# Altium PCB Layout_GraderGPS.PcbDoc
Units mil, origin at the board's own origin, x right, y up, seen from the top; angles counter-clockwise.
Board outline 3268.39 x 2592.36 mil, 2 copper layers (Top Layer, Bottom Layer); 68 components, 48 nets, 308 pads, 141 vias.
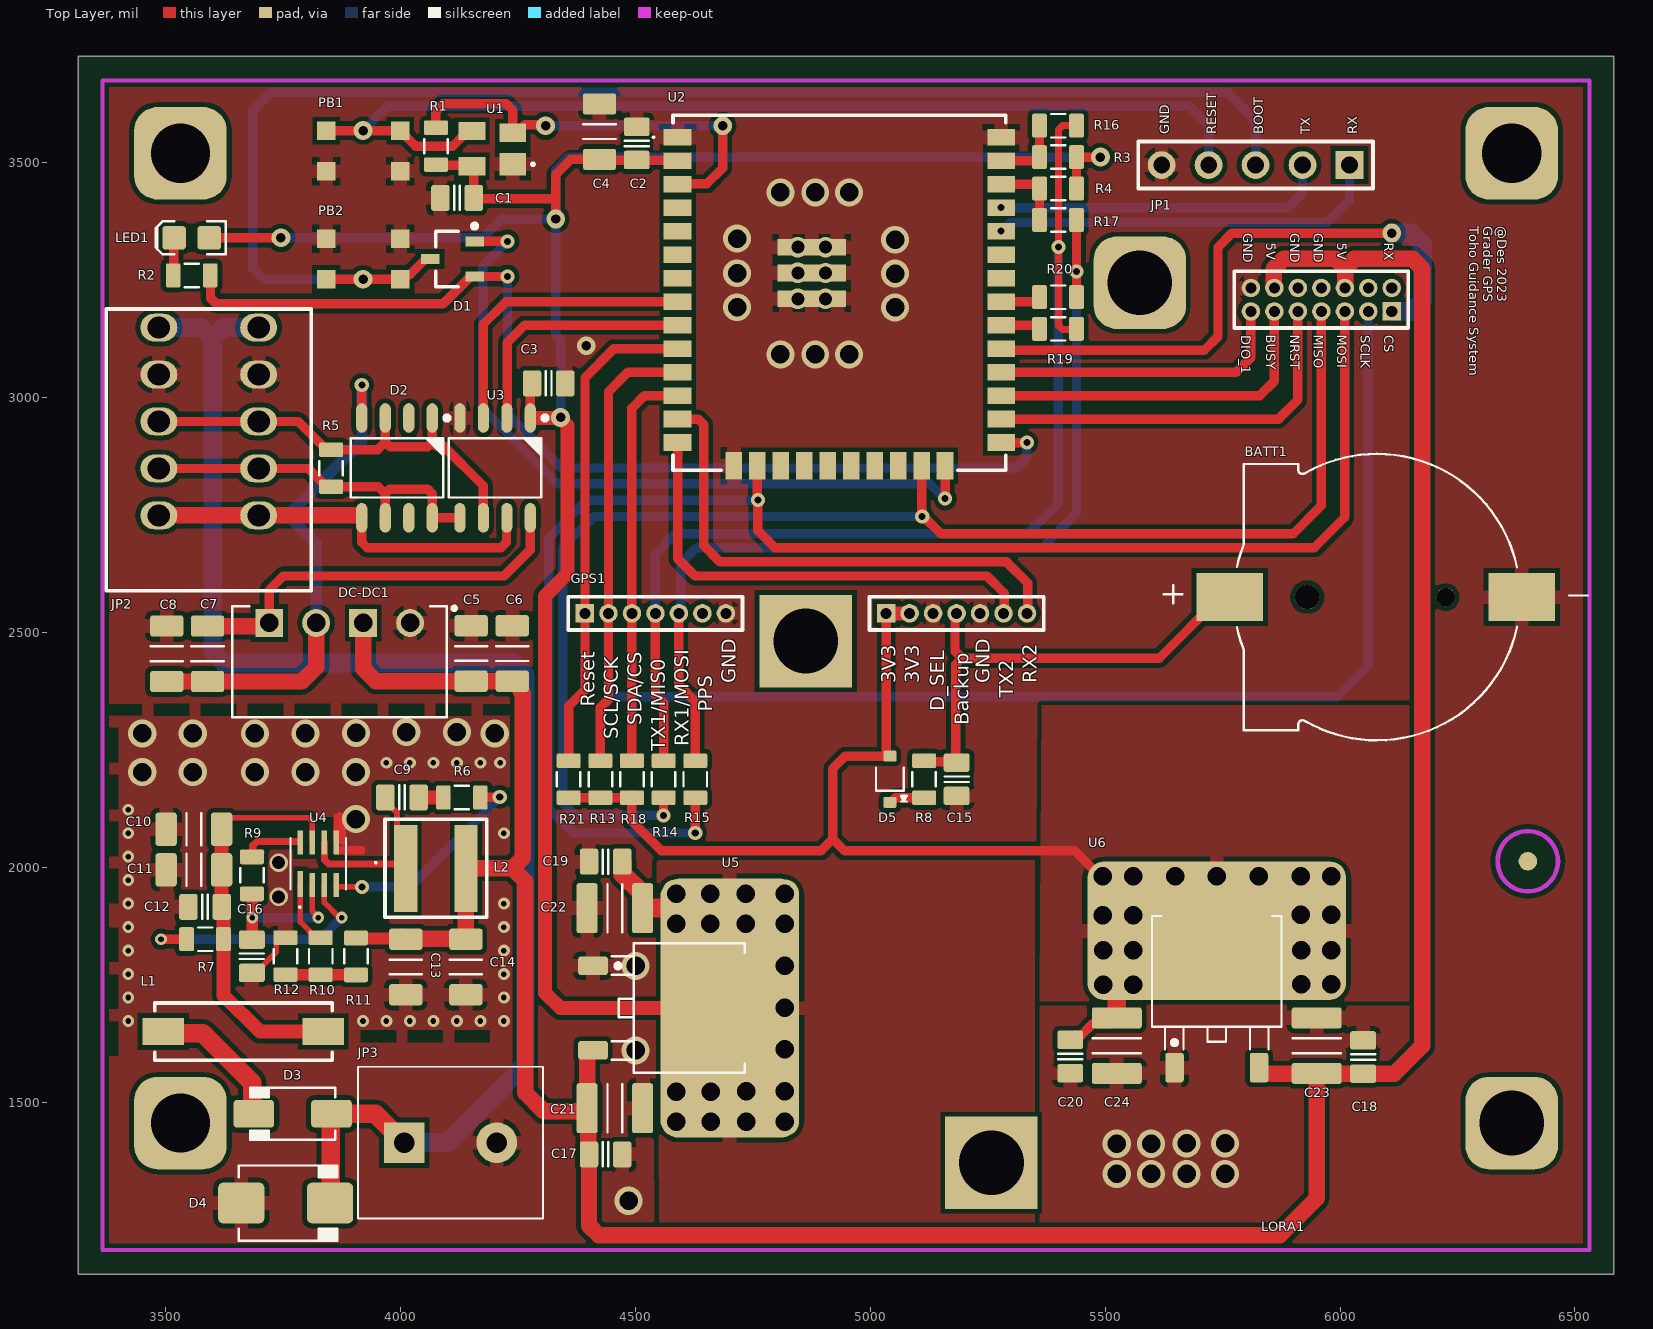
[diagram p0: Top Layer view]
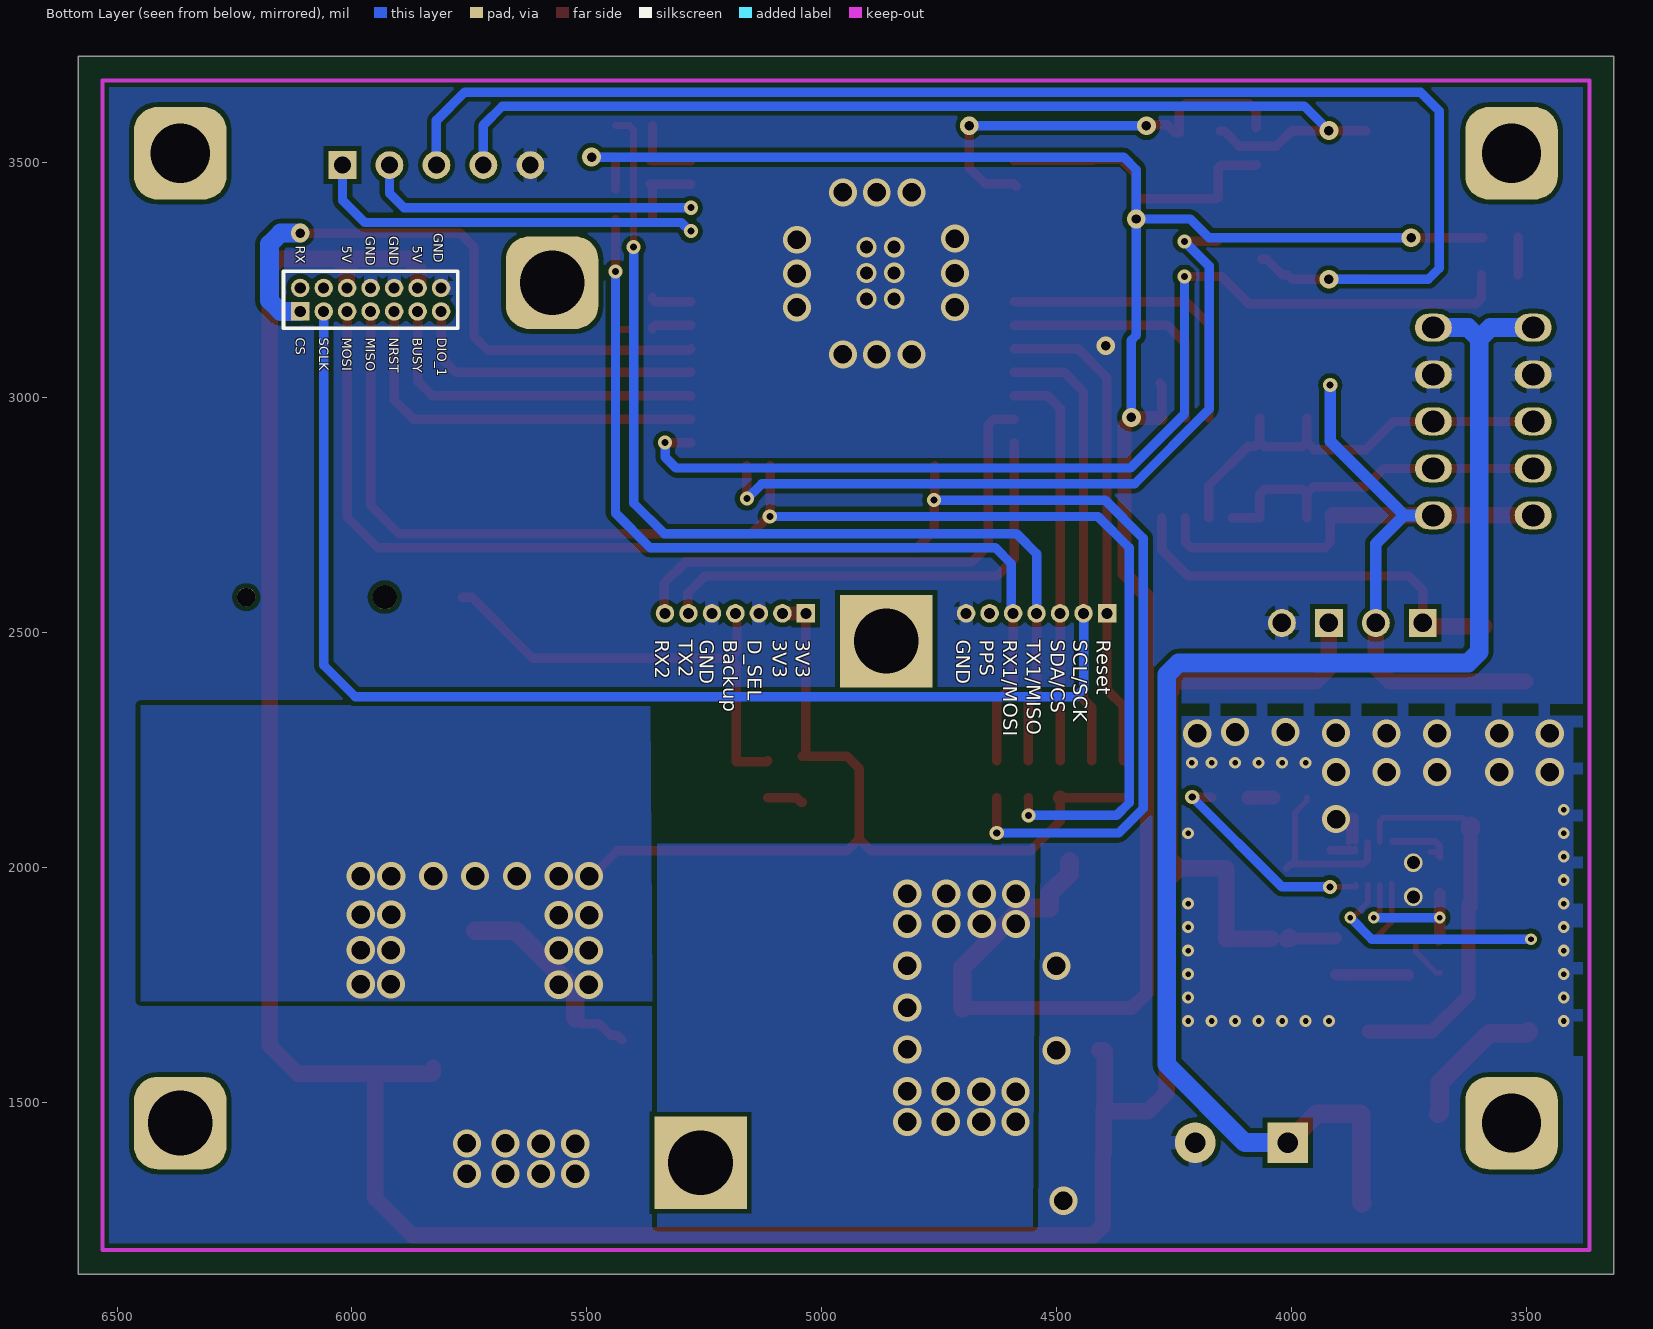
[diagram p1: Bottom Layer view, seen from below]

## Layer stack, top to bottom
Top Solder: solder mask 0.4, Solder Resist, Dk 3.5
Top Layer: signal copper 1.4
Dielectric 1: dielectric 12.6, FR-4, Dk 4.8
Bottom Layer: signal copper 1.4
Bottom Solder: solder mask 0.4, Solder Resist, Dk 3.5

## Board outline
3313.82,1133.82 3313.82,3726.18 6582.21,3726.18 6582.21,1133.82

## Design rules (kind name [scope] priority, off if disabled: settings)
Clearance [All] p1: gap=5 ignorepadtopadclearanceinfootprint=FALSE except(0: Arc-Hole Track-Hole SMDPad-Hole THPad-Hole Via-Hole Fill-Hole Poly-Hole Region-Hole Text-Hole)
HoleSize [All] p1: absolutevalues=TRUE maxlimit=1000 minlimit=1 maxpercent=80.000 minpercent=20.000
MinimumSolderMaskSliver [All] p1: minsoldermaskwidth=2
PolygonConnect [All] p1: thpad.connectstyle=Relief thpad.reliefconductorwidth=30 thpad.reliefentries=4 thpad.polygonreliefangle="90 Angle" thpad.airgapwidth=10 smdpad.connectstyle=Relief smdpad.reliefconductorwidth=30 smdpad.reliefentries=4 smdpad.polygonreliefangle="90 Angle" smdpad.airgapwidth=10 via.connectstyle=Direct via.reliefconductorwidth=10 via.reliefentries=4 via.polygonreliefangle="90 Angle" via.airgapwidth=10
RoutingVias [All] p1: holewidth=28 width=50 viastyle="Through Hole" minholewidth=28 minwidth=50 maxholewidth=28 maxwidth=50
SilkToSilkClearance [All] p1: silktosilkclearance=5
SilkToSolderMaskClearance [IsPad] p1: minsilkscreentomaskgap=2 clearancetoexposedcopper=TRUE
SolderMaskExpansion [All] p1: expansion=4 istentingtop=FALSE
Width [All] p1: maxlimit=100 minlimit=10 preferedwidth=30 minimp=50.000000 maximp=50.000000 favimp=50.000000
26 further rules are at their usual default settings.

## Components (designator, comment, footprint, x,y, rotation, side; value= is the part's Value field where it differs from the comment)
BATT1 "BAT" CR1220 6078.41,2574.99 r0 top
C1 "100nF" CAPC2012X135N 4120,3425 r180 top
C2 "100nF" CAPC2012X135N 4502.4,3541.12 r270 top
C3 "100nF" CAPC2012X135N 4315,3030 r0 top
C4 "10uF" CAPC3216X100N 4423.3,3565.96 r270 top
C5 "10uF" CAPC3216X180N 4150,2455 r270 top value=10uF/25v
C6 "10uF" CAPC3216X180N 4237.34,2454.92 r270 top value=10uF/25v
C7 "2.2uF/25V" CAPC3216X100N 3588.8,2454.39 r270 top value=10uF/25v
C8 "270pF/2kV" CAPC3216X175N 3501.92,2454.39 r270 top
C9 "100nF" CAPC2012X135N 4002.75,2148.62 r0 top
C10 "10uF" CAPC3216X180N 3559.64,2080.73 r0 top
C11 "10uF" CAPC3216X180N 3559.64,1994.46 r0 top
C12 "1uF" CAPC2012X135N 3583.5,1915.55 r0 top
C13 "22uF" CAPC3216X180N 4010.67,1787.56 r90 top
C14 "22uF" CAPC3216X180N 4138.62,1787.56 r90 top
C15 "100nF" CAPC2012X135N 5183.46,2187.28 r90 top
C16 "100nF" CAPC2012X135N 3683.11,1810.47 r90 top
C17 "100nF" CAPC2012X135N 4436.3,1388.52 r180 top
C18 "100nF" CAPC2012X135N 6048.89,1595.71 r270 top
C19 "100nF" CAPC2012X135N 4436.3,2011.94 r0 top
C20 "100nF" CAPC2012X135N 5425.38,1596.96 r90 top
C21 "47uF/16V" CAPC3225X220N 4455.83,1487.03 r0 top
C22 "47uF/16V" CAPC3225X220N 4455.83,1912.86 r180 top
C23 "47uF/16V" CAPC3225X220N 5950.03,1619.99 r90 top
C24 "47uF/16V" CAPC3225X220N 5524.54,1619.99 r270 top
D1 "BAT54C" SC59-3 4110,3295 r180 top
D2 "ESDA25B1RL" SOIC127P600X175-8AN 3992.12,2850.08 r270 top
D3 "1N4007" DO-214AC 3770,1475 r180 top
D4 "SMBJ28A" DO-214AA 3755,1285 r0 top
D5 "CUS520,H3F" SOD323 5041.56,2187.28 r90 top
DC-DC1 "PDSE1-S5-S5-S" "PDSE1-S (1W)" 3870,2565.28 r180 top
GPS1 "RTK-GPS" ZED-F9P 5382.28,1250.2 r90 top locked
JP1 "Debug" HDR1X5 6020,3495 r180 top
JP2 "Header 5" "Term_Block - 5P" 3591.27,2888.31 r270 top
JP3 "Input Power" 2828362 4007.59,1413.62 r180 top
L1 "470uH/1.5A/24V" INDP9630X28N 3665,1650 r0 top
L2 "10uH" IND_5.4X5.3 4074.64,1997.56 r0 top
LED1 "Blue" LED-0805-A 3555,3340 r180 top
LORA1 "E22-400M30S" 22s-V3 5970,2305 r90 top locked
PB1 "Master RST" PushButton1688 3920,3525 r180 top
PB2 "Boot" PushButton1688 3920,3295 r0 top
R1 "10K" RESC2012X70N 4075,3535 r90 top value=560
R2 "1k" RESC2012X70N 3555,3260 r0 top value=560
R3 "3k3" RESC2012X70N 5399.45,3511.73 r180 top
R4 "3k3" RESC2012X70N 5399.45,3444.77 r180 top
R5 "120" RESC2012X70N 3851.86,2849.33 r270 top value=560
R6 "20" RESC2012X70N 4130.11,2148.45 r0 top
R7 "1M" RESC2012X70N 3583.5,1846.69 r0 top
R8 "1K" RESC2012X70N 5114.37,2187.28 r270 top value=560
R9 "100K" RESC2012X70N 3683.11,1982.61 r90 top
R10 "51K" RESC2012X70N 3829.64,1810.47 r90 top
R11 "41K2" RESC2012X70N 3904.64,1810.16 r270 top
R12 "7K68" RESC2012X70N 3754.64,1810.47 r90 top
R13 "3K3" RESC2012X70N 4425.01,2187.28 r90 top
R14 "0R" RESC2012X70N 4559.66,2187.28 r270 top
R15 "0R" RESC2012X70N 4627.11,2187.28 r270 top
R16 "0R" RESC2012X70N 5399.45,3578.71 r180 top
R17 "0R" RESC2012X70N 5399.45,3378.12 r180 top
R18 "3K3" RESC2012X70N 4492.28,2187.28 r270 top
R19 "0R" RESC2012X70N 5399.46,3146.22 r180 top
R20 "0R" RESC2012X70N 5399.46,3213.5 r180 top
R21 "3K3" RESC2012X70N 4357.49,2187.28 r270 top
U1 "MIC6315-29D3UY-TR" MIC631529D3UYTR 4195,3530 r90 top
U2 "ESP32-WROOM-32UE-N16" ESP32WROOM32UEN16 4933.94,3222.99 r0 top locked
U3 "ISO1044BD" SOIC127P600X175-8AN 4200.87,2850.08 r270 top
U4 "MP9943GQ-Z" MP9943GQZ-SMD 3824.64,2007.56 r90 top
U5 "LD1117-3.3" TO-252 4555,1700 r270 top
U6 "LD1117-3.3" TO-252 5737.4,1719.05 r0 top

## Footprints (in the part's own frame and the unit in brackets; to place one, negate y for a bottom-side part, rotate by r counter-clockwise, add the part's x,y. Pads: shape width x height; smd on the part's side, far side on the other; paste and mask are expansions set on the pad)
22s-V3 [mm] "Lora 22s"
  rect 1x1 hole 0.6: 1(22.306,-3.556)
  round 1 hole 0.6: 2(23.576,-3.556) 3(22.306,-2.286) 4(23.576,-2.286) 5(22.306,-1.016) 6(23.576,-1.016) 7(22.306,0.254) 8(23.576,0.254) 9(22.306,1.524) 10(23.576,1.524) 11(22.306,2.794) 12(23.576,2.794) 13(22.306,4.064) 14(23.576,4.064)
  rrect50% 5x5 hole 3.5: S/2(-21.583,-10.043) S/2(23.86,10.069)
  body extent -35.73,-14.25 28.05,14.26, height 9.7
2828362 [mm]
  rect 2.2x2.2 hole 1.1: 1(0,0)
  round 2.2 hole 1.1: 2(-5,0)
  silkscreen extent -7.5,-4.1 2.5,4.1, body extent -8.09,-4.1 2.51,4.1, height 10.02
CAPC2012X135N [mm] "Chip Capacitor, Body 2.0x1.2mm, EIA 0805, IPC Medium Density"
  round 0.254 on Mech15: 0(0,0)
  rrect25% 1x1.4 smd: 1(-0.9,0) 2(0.9,0)
  Top Layer pour cut-out: -0.675,0.7 -0.475,0.9 0.475,0.9 0.675,0.7 0.675,-0.7 0.475,-0.9 -0.475,-0.9 -0.675,-0.7
  silkscreen extent -0.15,-0.65 0.15,0.65, body extent -1.1,-0.72 1.1,0.73, height 1.34
CAPC3216X100N [mm] "Chip Capacitor, Body 3.2x1.6mm, 1.0mm H, EIA 1206, IPC Medium Density"
  round 0.508 on Mech15: 0(0,0)
  rrect25% 1.15x1.8 smd: 1(-1.5,0) 2(1.5,0)
  silkscreen extent -0.4,-0.88 0.4,0.88, body extent -1.7,-0.9 1.7,0.9, height 1
CAPC3216X175N [mm] "Chip Capacitor, Body 3.2x1.6mm, 1.75mm H, EIA 1206, IPC Medium Density"
  round 0.508 on Mech15: 0(0,0)
  rrect25% 1.15x1.8 smd: 1(-1.5,0) 2(1.5,0)
  silkscreen extent -0.4,-0.88 0.4,0.88, body extent -1.7,-0.9 1.7,0.9, height 1.75
CAPC3216X180N [mm] "Chip Capacitor, Body 3.2x1.6mm, 1.8mm H, EIA 1206, IPC Medium Density"
  round 0.508 on Mech15: 0(0,0)
  rrect25% 1.15x1.8 smd: 1(-1.5,0) 2(1.5,0)
  silkscreen extent -0.4,-0.88 0.4,0.88, body extent -1.7,-0.9 1.7,0.9, height 1.8
CAPC3225X220N [mm] "Chip Capacitor, Body 3.2x2.5mm, EIA 1210, IPC Medium Density"
  round 0.508 on Mech15: 0(0,0)
  rrect25% 1.15x2.7 smd: 1(-1.5,0) 2(1.5,0)
  silkscreen extent -0.4,-1.3 0.4,1.3, body extent -1.8,-1.4 1.8,1.4, height 2.19
CR1220 [mm] "Holder battery size CR1220"
  rect 3.6x2.6 smd: 1(-7.97,0) 2(7.82,0)
  round 1.3 hole 1.3 unplated: ""(-3.77,0)
  round 1 hole 1 unplated: ""(3.72,0)
  silkscreen extent -11.52,-7.74 11.4,7.75, body extent -9.41,-7.56 9.39,7.58, height 4.13
DO-214AA [mm] "JEDEC DO214 variation AA. SMB"
  round 0.508 on Mech15: 0(0,0)
  rrect25% 2.5x2.2 smd: 1(-2.4,0) 2(2.4,0)
  silkscreen extent -2.54,-2.03 2.79,2.03, body extent -2.8,-1.97 2.8,1.98, height 2.62
DO-214AC [mm] "JEDEC DO214 variation AC. SMA"
  round 0.508 on Mech15: 0(0,0)
  rrect25% 2.2x1.5 smd: 1(-2.1,0) 2(2.1,0)
  silkscreen extent -2.3,-1.4 2.3,1.4, body extent -2.6,-1.3 2.6,1.3, height 2.42
ESP32WROOM32UEN16 [mm]
  rect 1.5x0.9 smd: 1(-8.75,8.41) 2(-8.75,7.14) 3(-8.75,5.87) 4(-8.75,4.6) 5(-8.75,3.33) 6(-8.75,2.06) 7(-8.75,0.79) 8(-8.75,-0.48) 9(-8.75,-1.75) 10(-8.75,-3.02) 11(-8.75,-4.29) 12(-8.75,-5.56) 13(-8.75,-6.83) 14(-8.75,-8.1) 25(8.75,-8.1) 26(8.75,-6.83) 27(8.75,-5.56) 28(8.75,-4.29) 29(8.75,-3.02) 30(8.75,-1.75) 31(8.75,-0.48) 32(8.75,0.79) 33(8.75,2.06) 34(8.75,3.33) 35(8.75,4.6) 36(8.75,5.87) 37(8.75,7.14) 38(8.75,8.41)
  rect 0.9x1.5 smd: 15(-5.715,-9.35) 16(-4.445,-9.35) 17(-3.175,-9.35) 18(-1.905,-9.35) 19(-0.635,-9.35) 20(0.635,-9.35) 21(1.905,-9.35) 22(3.175,-9.35) 23(4.445,-9.35) 24(5.715,-9.35)
  rect 0.9x0.9 smd: 39(-1.5,1.07) 40(-2.9,1.07) 41(-0.1,1.07) 42(-2.9,-0.33) 43(-1.5,-0.33) 44(-0.1,-0.33) 45(-0.1,2.47) 46(-1.5,2.47) 47(-2.9,2.47)
  silkscreen extent -10.1,-9.6 9,9.6, body extent -9.03,-9.67 9.04,9.57, height 3.4
HDR1X5 [mm] "Connector; Header; 5 Position"
  rect 1.5x1.5 hole 0.9: 1(0,0)
  round 1.5 hole 0.9: 2(2.54,0) 3(5.08,0) 4(7.62,0) 5(10.16,0)
  silkscreen extent -1.27,-1.27 11.43,1.27
IND_5.4X5.3 [mm]
  rect 1.25x4.7 smd: 1(-1.625,0) 2(1.625,0)
  silkscreen extent -3.3,-2.65 2.75,2.65, body extent -2.75,-2.65 2.75,2.65, height 5.1
INDP9630X28N [mm] "Precision Wire Wound Inductor, 2-Leads, Body 9,60x3,05mm, IPC Medium Density"
  rect 2.25x1.45 smd: 1(-4.325,0) 2(4.325,0)
  silkscreen extent -4.8,-1.55 4.8,1.55, body extent -4.8,-1.53 4.8,1.53, height 2.84
LED-0805-A [mil]
  round 20 on Mech15: 0(0,0)
  rrect25% 50x50 smd: 1(37.5,0) 2(-37.5,0)
  Top Layer pour cut-out: -15,30 15,30 15,-30 -15,-30
  silkscreen extent -72,-35 77,35, body extent -39,-25 39,25, height 31
MIC631529D3UYTR [mm]
  rect 1.2x1.44 smd: 1(-0.85,-1.1)
  rect 1x1.44 smd: 2(0.85,-1.1) 3(0.95,1.1) 4(-0.95,1.1)
  silkscreen extent -0.9,-2.25 -0.8,-2.15, body extent -1.46,-0.65 1.46,0.65, height 1.22
MP9943GQZ-SMD [mm]
  rect 1.4x0.3 smd: 1(-1.1,0.975)
  rect 1.3x0.3 smd: 2(-1.15,0.325) 3(-1.15,-0.325) 4(-1.15,-0.975) 5(1.15,-0.975) 6(1.15,-0.325) 7(1.15,0.325) 8(1.15,0.975)
  silkscreen extent -2.4,-1.5 1.4,1.5, body extent -1.5,-1.5 1.5,1.5, height 1.1
"PDSE1-S (1W)" [mm] "DC-DC"
  round 1.508 hole 1: 1(-3.81,1.15) 3(1.27,1.15)
  rect 1.508x1.508 hole 1: 2(-1.27,1.15) 4(3.81,1.15)
  silkscreen extent -6.3,0.25 5.8,6.25, body extent -5.8,0.25 5.8,6.25, height 10
PushButton1688 [mm]
  rect 1x1 smd: 1(-2,1.1) 2(2,1.1) 3(-2,-1.1) 4(2,-1.1)
RESC2012X70N [mm] "Chip Resistor, Body 2.0x1.2mm, EIA 0805, IPC Medium Density"
  round 0.254 on Mech15: 0(0,0)
  rrect25% 0.8x1.3 smd: 1(-1,0) 2(1,0)
  Top Layer pour cut-out: -0.725,0.65 -0.525,0.85 0.525,0.85 0.725,0.65 0.725,-0.65 0.525,-0.85 -0.525,-0.85 -0.725,-0.65
  silkscreen extent -0.38,-0.64 0.38,0.64, body extent -1.1,-0.67 1.1,0.68, height 0.69
SC59-3 [mm]
  rect 1x0.55 smd: 1(-1.2,-0.95) 2(-1.2,0.95) 3(1.2,0)
  silkscreen extent -1.33,-1.9 0.9,1.5, body extent -1.3,-1.45 1.3,1.45, height 1.14
SOD323 [mm] "SOD-323; 2 Leads; Body 1.8 x 1.35 mm, (LxW)"
  round 0.508 on Mech15: 0(0,0)
  rrect25% 0.6x0.7 smd: 1(1.25,0) 2(-1.25,0)
  silkscreen extent -1.2,-0.9 0.64,0.75, body extent -1.3,-0.68 1.3,0.68, height 1.1
SOIC127P600X175-8AN [mm] "SOIC, 8-Leads, Body 4.9x3.9mm, Pitch 1.27mm, IPC Medium Density"
  round 1 on Mech15: 0(0,0)
  oval 1.6x0.6 smd: 1(-2.7,1.905) 2(-2.7,0.635) 3(-2.7,-0.635) 4(-2.7,-1.905) 5(2.7,-1.905) 6(2.7,-0.635) 7(2.7,0.635) 8(2.7,1.905)
  silkscreen extent -2.82,-2.5 1.6,2.83, body extent -3,-2.45 3,2.45, height 1.75
"Term_Block - 5P" [mm]
  oval 1.5x2 hole 1.2: 1(-6.62,-2.7) 1(-6.62,2.7) 2(-4.08,2.7) 2(-4.08,-2.7) 3(-1.54,2.7) 3(-1.54,-2.7) 4(1,2.7) 4(1,-2.7) 5(3.54,2.7) 5(3.54,-2.7)
  silkscreen extent -7.62,-5.55 7.62,5.55
TO-252 [mm] "D-PAK/TO-252-AA; 3 Leads (1 Cropped); Body 10.3 (inc. leads) x 6.7 mm (LxW max)"
  round 0.5 on Mech15: 0(0,0)
  rrect25% 1x1.6 smd: 1(-2.285,-3.7) 3(2.285,-3.7)
  rrect25% 14x7.5 smd: 4(0,3.7)
  silkscreen extent -3.5,-2.7 3.5,4.5, body extent -3.3,-3.95 3.3,5.76, height 2.31
ZED-F9P [mm] "GPS Sensor"
  rect 1x1 hole 0.6: 1(32.774,25.146) 8(32.774,8.86)
  round 1 hole 0.6: 2(32.774,23.876) 3(32.774,22.606) 4(32.774,21.336) 5(32.774,20.066) 6(32.774,18.796) 7(32.774,17.526) 9(32.774,7.59) 10(32.774,6.32) 11(32.774,5.05) 12(32.774,3.78) 13(32.774,2.51) 14(32.774,1.24)
  rect 5x5 hole 3.5: S/2(3.067,3.167) S/2(31.274,13.208)
  silkscreen extent 31.87,0.34 33.67,26.05, body extent 0,0 34.13,26.42, height 10

## Part data
BATT1: library part MHDR1X2, "Header, 2-Pin", LatestRevisionDate=17-Jul-2002, LatestRevisionNote="Re-released for DXP Platform.", Publisher="Altium Limited"
C1 C2 C3 C4 C5 C6 C7 C8 C9 C10 C11 C12 C13 C14 C15 C16 C17 C18 C19 C20: library part Cap, "Capacitor", LatestRevisionDate=17-Jul-2002, LatestRevisionNote="Re-released for DXP Platform.", PackageDescription="Radial Cap, Thru-Hole; 2 Leads; 0.3 in Pin Spacing", PackageReference=RAD-0.3, Published=8-Jun-2000, Publisher="Altium Limited"
C21 C22 C23 C24: library part KCM55WC71E107MH13L, "Capacitor", Manufacturer_Name="Murata Electronics", Mouser Part Number=81-KCM55WC71E107MH13, Datasheet Link=https://psearch.en.murata.com/capacitor/product/KCM55WC71E107MH13%23.html, Height=6.7mm, Manufacturer_Part_Number=KCM55WC71E107MH13L, Mouser Price/Stock=https://www.mouser.co.uk/ProductDetail/Murata-Electronics/KCM55WC71E107MH13L/?qs=rrS6PyfT74chf2MiAK9y9w%3D%3D, type=Ceramic
D1: library part RB420
D2: "TVS DIODA", Manufacturer_Name=STMicroelectronics, Mouser Part Number=511-ESDA25B1-TR, Arrow Part Number=ESDA25B1RL, Arrow Price/Stock=https://www.arrow.com/en/products/esda25b1rl/stmicroelectronics?region=nac, Datasheet Link=https://datasheet.datasheetarchive.com/originals/distributors/Datasheets-31/DSA-604715.pdf, Height=1.75mm, Manufacturer_Part_Number=ESDA25B1RL, Mouser Price/Stock=https://www.mouser.co.uk/ProductDetail/STMicroelectronics/ESDA25B1RL?qs=W9XpDeWYzcpfBY1EWDH0LA%3D%3D
D3: library part "Diode 1N4001", "1 Amp General Purpose Rectifier", Code_JEDEC=DO-204-AL, ComponentLink1Description="Manufacturer Link", ComponentLink1URL=http://www.fairchildsemi.com/, ComponentLink2Description=Datasheet, ComponentLink2URL=http://www.fairchildsemi.com/ds/1N%2F1N4001.pdf, DatasheetVersion=1998, LatestRevisionDate=17-Jul-2002, LatestRevisionNote="Re-released for DXP Platform.", PackageDescription="Diode, Axial; Body 5.2 x 2.7 mm (LxDia. max), Lead Dia. 0.86 mm (max)", PackageReference=DO-41, PackageVersion=Aug-1999, Published=8-Jun-2000, Publisher="Altium Limited"
D4: library part "D Schottky", "Schottky Diode", Code_JEDEC=DO-214-AA, LatestRevisionDate=17-Jul-2002, LatestRevisionNote="Re-released for DXP Platform.", PackageDescription="DO-214-AA/SMB; 2 C-Bend Leads; Body 5.3 x 3.6 mm, inc. leads (LxW)", PackageReference=SMB, Published=8-Jun-2000, Publisher="Altium Limited"
D5: library part "D Zener", "Zener Diode", LatestRevisionDate=17-Jul-2002, LatestRevisionNote="Re-released for DXP Platform.", PackageDescription="Diode, Thru-Hole; 2 Leads; 0.7 in Pin Spacing", PackageReference=DIODE-0.7, Published=8-Jun-2000, Publisher="Altium Limited"
DC-DC1: library part PDSE1-S24-S12-S, "DC-DC 24 to 12  / PDSE1-S24-S12-S"
GPS1: library part ZED-F9P, "GPS Sensor"
JP1: library part "Header 5", "Header, 5-Pin", LatestRevisionDate=17-Jul-2002, LatestRevisionNote="Re-released for DXP Platform.", Publisher="Altium Limited"
JP2: "Header, 5-Pin", LatestRevisionDate=17-Jul-2002, LatestRevisionNote="Re-released for DXP Platform.", Publisher="Altium Limited"
JP3: library part "Header 2", "Header, 2-Pin", LatestRevisionDate=17-Jul-2002, LatestRevisionNote="Re-released for DXP Platform.", Publisher="Altium Limited"
L1 L2: library part MPL-AL5050-100, "Inductor", Manufacturer_Name="Monolithic Power Systems (MPS)", Mouser Part Number=946-MPL-AL5050-100, Datasheet Link=https://www.monolithicpower.com/en/documentview/productdocument/index/version/2/document_type/Datasheet/lang/en/sku/MPL-AL5050-100/document_id/5809/, Height=5mm, Manufacturer_Part_Number=MPL-AL5050-100, Mouser Price/Stock=https://www.mouser.co.uk/ProductDetail/Monolithic-Power-Systems-MPS/MPL-AL5050-100?qs=sPbYRqrBIVm5wy9Bi%2FiK%252BQ%3D%3D
LED1: library part LED1, "Typical Blue GaAs LED", LatestRevisionDate=08-Jul-2005, LatestRevisionNote="Mech Layer 1 removed.", PackageDescription="LED; 2 Leads", PackageReference=LED-1, Published=8-Jun-2000, Publisher="Altium Limited"
LORA1: library part Lora, "Lora 22S / Lora 30S"
PB1 PB2: library part PB_SW_1
R1 R2 R3 R4 R5 R6 R7 R8 R9 R10 R11 R12 R13 R14 R15 R16 R17 R18 R19 R20 R21: library part Res2, "Resistor", LatestRevisionDate=17-Jul-2002, LatestRevisionNote="Re-released for DXP Platform.", PackageDescription="Axial Device, Thru-Hole; 2 Leads; 0.4 in Pin Spacing", PackageReference=AXIAL-0.4, Published=8-Jun-2000, Publisher="Altium Limited"
U1: "Integrated Circuit", Manufacturer_Name=Microchip, Mouser Part Number=998-MIC6315-29D3UYTR, Datasheet Link=http://ww1.microchip.com/downloads/en/devicedoc/mic6315.pdf, Height=1.12mm, Manufacturer_Part_Number=MIC6315-29D3UY-TR, Mouser Price/Stock=https://www.mouser.co.uk/ProductDetail/Microchip-Technology-Micrel/MIC6315-29D3UY-TR?qs=Y3Q3JoKAO1RCG5WxNvIuAQ%3D%3D
U2: library part ESP32-WROOM-32UE-N16A
U3: "Integrated Circuit", Manufacturer_Name="Texas Instruments", Mouser Part Number=595-ISO1044BD, Arrow Part Number=ISO1044BD, Arrow Price/Stock=https://www.arrow.com/en/products/iso1044bd/texas-instruments?region=nac, Datasheet Link=https://www.ti.com/lit/ds/symlink/iso1044.pdf?ts=1621674257443&ref_url=https%253A%252F%252Fwww.ti.com%252Fstore%252Fti%252Fen%252Fp%252Fproduct%252F%253Fp%253DISO1044BD, Height=1.75mm, Manufacturer_Part_Number=ISO1044BD, Mouser Price/Stock=https://www.mouser.co.uk/ProductDetail/Texas-Instruments/ISO1044BD?qs=W%2FMpXkg%252BdQ6CUu0TGf8UTA%3D%3D
U4: "Integrated Circuit", Manufacturer_Name="Monolithic Power Systems (MPS)", Mouser Part Number=946-MP9943GQ-Z, Datasheet Link=https://www.monolithicpower.com/jp/documentview/productdocument/index/version/2/document_type/Datasheet/lang/en/sku/MP9943/document_id/865/, Height=1mm, Manufacturer_Part_Number=MP9943GQ-Z, Mouser Price/Stock=https://www.mouser.co.uk/ProductDetail/Monolithic-Power-Systems-MPS/MP9943GQ-Z?qs=493kPxzlxfKVcyEndxwGRg%3D%3D
U5 U6: library part LM1117-3.3V, "AP2114D-3.3TRG1, 3.3V LDO Voltage Regulator"

## Free pads (board coordinates)
  round 39.37 smd paste-39.37 mask+39.37: 2(6399.65,2012.56)
  rrect50% 196.85x196.85 hole 125.98: S/2(3531.02,1455.28) S/2(3531.02,3520) S/2(6365.39,3520)

## Via types
v1: diameter 60, hole 39.37, Top Layer to Bottom Layer, 63 vias
v2: diameter 25, hole 11.81, Top Layer to Bottom Layer, 33 vias
v3: diameter 30, hole 15, Top Layer to Bottom Layer, 15 vias
v4: diameter 59.06, hole 39.37, Top Layer to Bottom Layer, 12 vias
v5: diameter 40, hole 20, Top Layer to Bottom Layer, 10 vias
v6: diameter 43.31, hole 27.56, Top Layer to Bottom Layer, 6 vias
v7: diameter 39.37, hole 27.56, Top Layer to Bottom Layer, 2 vias

## Nets (pads, with @x,y where several pads share a name; then routed paths per layer and width w, separated by ;. In a path a pad name is that pad's centre, name@x,y a point inside that pad or via, vN(x,y) a via of type N, cw(c..) or ccw(c..) an arc to the next point about the centre after c; other vN are vias at no path point)
3V3: C1.1 C2.2 C3.1 C4.2 C19.2 C22.1 LED1.2 R1.1 R3.1 R4.1 U1.4 U2.2 U3.1 U5.4 | length 5498.4
  Top Layer w20: LED1.2 v5(3745,3340) ; R1.1 4076.52,3494.11 4150.18,3494.11 U1.4 4155.63,3488.66 C1.1@4155.63,3428.94 ; C1.1 4159.57,3425 4161.32,3423.25 4330,3423.25 ; U3.1 4275.87,3026.3 C3.1 ; v5(4330,3380) 4330,3423.25 ; 4330.48,3423.25 4330,3423.25 ; C4.2@4423.3,3505.5 4588.04,3505.5 U2.2 ; C4.2 4361.91,3506.91 4330,3475 4330,3423.25 ; R4.1 R3.1 v5@5489.69,3511.73
  Top Layer w30: U3.1@4279.05,2956.12 4338.92,2956.12 v5(4340.46,2957.65) 4340.46,2954.95 4355,2940.4 4355,2625 4306.9,2576.9 4306.9,2001.77 4307.5,2001.17 4307.5,1732.5 4340,1700 U5.4
  Top Layer w40: C19.2 4472.05,2011.62 4472.05,1986.21 4514.89,1943.37 C22.1 4574.32,1912.86 4700.67,1786.51 U5.4
  Bottom Layer w20: v5(3745,3340) 4175,3340 4215,3380 v5(4330,3380) ; v5(4340.46,2957.65) 4340.46,3122.02 4330,3132.48 v5(4330,3380) ; v5(5489.69,3511.76) 4356.76,3511.76 4330,3485 v5(4330,3380)
  other v1: 4587.05,1457.77 4659.96,1457.77 4735.48,1457.77 4817.56,1457.77 4587.05,1521.98 4659.96,1521.98 4735.48,1522.85 4817.56,1522.85 4817.56,1611.95 4817.56,1701.05 4817.56,1790.16 4586.19,1879.26 4659.1,1879.26 4734.61,1879.26 4817.56,1879.26 4586.19,1943.14 4659.1,1943.14 4734.61,1943.98 4817.56,1943.98
3V3_GPS: C20.2 C24.1 D5.1 GPS1.8 GPS1.9 R13.1 R18.2 R21.2 U6.4 | length 2337.5
  Top Layer w20: R21.2@4357.96,2147.91 R13.1 R18.2 ; R18.2@4491.72,2147.16 4491.72,2098.28 4555,2035 4895,2035 4920,2060 ; GPS1.8 5033.46,2242.63 D5.1@5039.6,2236.5 ; D5.1 5033.46,2236.5 4946.5,2236.5 4920,2210 4920,2060 ; C20.2 5435.07,1642.08 5448.71,1642.08 5473.03,1666.41 5511.91,1666.41 C24.1 ; U6.4@5492.25,1977.75 5435,2035 4945,2035 4920,2060
  Top Layer w30: R18.2@4491.72,2147.16 4492.28,2147.72 R18.2 ; GPS1.8 GPS1.9
  Top Layer w40: C24.1 5524.54,1738.37 5650.89,1864.72 U6.4
  other v1: 5495.73,1749.79 5559.61,1749.79 5916.89,1750.66 5981.1,1750.66 5495.73,1822.7 5559.61,1822.7 5916.89,1823.57 5981.1,1823.57 5494.89,1898.21 5559.61,1898.21 5916.02,1899.08 5981.1,1899.08 5494.89,1981.17 5559.61,1981.17 5648.71,1981.17 5737.82,1981.17 5826.92,1981.17 5916.02,1981.17 5981.1,1981.17
5V_IN: C5.2 C6.2 C13.2 C14.2 C17.2 C18.2 C21.1 C23.1 DC-DC1.2 L2.2 LORA1.6 LORA1.12 R11.1 U5.3 U6.3 | length 6657.8
  Top Layer w25: R11.1 3906.1,1848.07 4001.1,1848.07 4007.97,1848.07 C13.2@4009.47,1846.58
  Top Layer w35: DC-DC1.2 3920,2422.99 3947.04,2395.94 4130,2395.94 C5.2 ; C13.2@4001.1,1848.07 C13.2@4004.78,1851.76 ; C13.2@4009.47,1846.58 C13.2@4009.51,1846.62 ; C13.2@4042.66,1847.58 4137.66,1847.58 C14.2 L2.2 4237.5,1997.56 ; C5.2@4151.85,2395.91 C6.2 C6.2 ; C6.2@4240.45,2395.87 4250.14,2395.87 4255.28,2390.73 4255.28,2374.6 4259.65,2370.23 4259.65,2019.71 4237.5,1997.56 ; U5.3 4398.96,1610.04 4396.77,1607.85 C21.1 ; U6.3 5827.36,1562.46 5829.55,1560.27 C23.1@5950.03,1560.27 ; LORA1.12 5859.16,3234.01 5859.16,3274.5 5879.67,3295 5991.17,3295 6010.84,3275.33 ; C23.1 C23.1@5950.03,1560.27 ; LORA1.6 6010.84,3234.01 6010.84,3275.33 ; 4237.5,1997.56 4265,1970.06 4265,1520 4305,1480 4391.64,1480 4391.64,1481.89 C21.1 ; C21.1 4398.82,1484.98 4398.82,1390.56 C17.2 4400.87,1236.94 4421.37,1216.44 5871.44,1216.44 5950.03,1295.03 C23.1@5950.03,1560.27 ; C23.1@5950.03,1560.27 C18.2 6115.27,1560.27 6175,1620 6175,3274.5 6154.5,3295 6030.5,3295 6010.84,3275.33
5V_IS: C7.1 DC-DC1.4 U3.8 | length 854
  Top Layer w20: DC-DC1.4 3720,2590 3750,2620 4220,2620 4275.42,2675.42 4275.42,2743.33 U3.8
  Top Layer w35: C7.1 DC-DC1.4@3713.45,2513.45
Batt: BATT1.1 C15.2 GPS1.11 R8.1 | length 1020.5
  Top Layer w20: R8.1 5116.34,2224.69 5181.5,2224.69 5181.5,2431.5 5195,2445 ; GPS1.11 5180,2537.06 5180,2460 5195,2445 ; BATT1.1 5744.96,2575 5614.96,2445 5195,2445
BOOT: D1.3 JP1.3 PB2.3 PB2.4 | length 3090.5
  Top Layer w20: PB2.3 v5(3920,3251.69) PB2.4 4008.43,3261.38 4019.31,3261.38 4052.1,3294.17 4061.93,3294.17 D1.3
  Bottom Layer w20: v5(3920,3251.69) 3708.31,3251.69 3685,3275 3685,3610 3725,3650 5760,3650 5820,3590 JP1.3
BOOT1: D1.1 U2.24 | length 1582.1
  Top Layer w20: D1.1 v3(4227.37,3332.4) ; v3(5158.94,2784.76) U2.24
  Bottom Layer w20: v3(4227.37,3332.4) 4175,3280.03 4175,2975 4333.4,2816.6 5127.09,2816.6 v3(5158.94,2784.76)
BOOT2: D1.2 R2.2 U2.25 | length 2251.9
  Top Layer w20: R2.2@3595,3261.34 3595,3211.72 3606.72,3200 4090.79,3200 4148.39,3257.59 D1.2 v3(4227.37,3257.59) ; U2.25 5278.51,2904.01 v3(5333.15,2904.01)
  Bottom Layer w20: v3(4227.37,3257.59) 4227.37,2965.06 4342.43,2850 5310,2850 5333.15,2873.15 v3(5333.15,2904.01)
Busy: LORA1.11 U2.27 | length 742.5
  Top Layer w20: U2.27 5829.09,3004.09 5860,3035 LORA1.11
CANH: D2.1 D2.3 JP2.3 R5.1 U3.6 | length 940.4
  Top Layer w20: JP2.3@3484.97,2948.94 3697.57,2948.94 3781.78,2948.94 3842.02,2888.7 R5.1 3950.74,2888.7 3967.12,2905.08 ; D2.3 3967.12,2905.08 ; D2.1 4067.12,2905.08 ; U3.6 4175.87,2812.2 4092.2,2895.87 4076.34,2895.87 4067.12,2905.08 ; 3967.12,2905.08 3977.12,2895.08 4057.12,2895.08 4067.12,2905.08
CANL: D2.6 D2.8 JP2.4 R5.2 U3.5 | length 774.1
  Top Layer w20: JP2.4@3484.97,2848.94 3697.57,2848.94 3803.04,2848.94 3842.02,2809.96 R5.2 3952.25,2809.96 3967.12,2795.08 ; D2.6 3967.12,2795.08 ; U3.5 D2.8 4067.12,2795.08 4057.12,2805.08 3977.12,2805.08 3967.12,2795.08
CS_GPS: GPS1.3 R18.1 U2.12 | length 858.9
  Top Layer w20: R18.1 GPS1.3 4492.28,2977.28 4519.09,3004.09 U2.12
CS_LoRa: LORA1.1 U2.29 | length 1317.7
  Top Layer w20: U2.29 5281.89,3100.63 5710.63,3100.63 5740,3130 5740,3320 5770,3350 v5(6110,3350)
  Bottom Layer w40: LORA1.1 6151.91,3183.17 6175.34,3206.6 6175.34,3326.57 6151.91,3350 v5(6110,3350)
GND: BATT1.2 C1.2 C2.1 C3.2 C4.1 C5.1 C6.1 C8.1 C10.1 C11.1 C12.1 C13.1 C14.1 C15.1 C16.1 C17.1 C18.1 C19.1 C20.1 C21.2 C22.2 C23.2 C24.2 D4.1 DC-DC1.1 GPS1.7 GPS1.10 GPS1.12 JP1.5 JP2.2 JP3.2 LORA1.8 LORA1.10 LORA1.14 PB1.1 PB1.2 PB2.1 PB2.2 R12.2 U1.1 U2.1 U2.15 U2.38 U2.39 U2.40 U2.41 U2.42 U2.43 U2.44 U2.45 U2.46 U2.47 U3.4 U4.5 U5.1 U6.1 | length 389.8
  Top Layer w12: C16.1 3690.98,1775.04 3735.05,1819.11 3735.05,1840.09 3744.8,1849.84 R12.2 ; U4.5@3862.91,2033.1 3917.91,2033.1 ; U4.5 3863.03,2107.84 ; U4.5@3863.51,2039.13 3918.51,2039.13 ; 3869.54,2056.3 3869.54,2111.3 ; 3877.27,2052.12 v1@3877.27,2107.12
  other v1: 4485,1290 5524.61,1346.85 5597.52,1346.85 5673.04,1346.85 5755.12,1346.85 5524.61,1411.06 5597.52,1411.06 5673.04,1411.93 5755.12,1411.93 4500,1610 4500,1790 3904.64,2102.56 3449.76,2202.56 3557.23,2202.56 3689.7,2202.56 3797.17,2202.56 3904.64,2202.56 3449.76,2284.91 3557.23,2284.91 3689.65,2284.91 3797.12,2284.91 4200,2285 3904.91,2285.88 4012.06,2287.56 4119.53,2287.56
  other v2: 3419.64,1672.56 3919.64,1672.56 3969.64,1672.56 4019.64,1672.56 4069.64,1672.56 4119.65,1672.56 4169.65,1672.56 4219.65,1672.56 3419.64,1722.56 4219.65,1722.56 3419.64,1772.56 4219.65,1772.56 3419.64,1822.56 4219.65,1822.56 3419.64,1872.56 4219.65,1872.56 3419.64,1922.56 4219.65,1922.56 3419.64,1972.56 3419.64,2022.56 3419.64,2072.56 4219.65,2072.56 3419.64,2122.56 3969.64,2222.56 4019.64,2222.56 4069.64,2222.56 4119.65,2222.56 4169.65,2222.56 4211.51,2222.56
  other v4: 4808.44,3091.7 4882.38,3091.7 4954.55,3091.7 4716.08,3192.28 5052.38,3191.7 4716.08,3264.45 5052.38,3263.87 5052.38,3336.04 4716.08,3338.38 4808.44,3436.7 4882.38,3436.7 4954.55,3436.7
  other v5: 4395,3110
  other v6: 4845.41,3209.98 4904.36,3210.02 4845.41,3265.3 4904.36,3264.94 4845.41,3320.22 4904.36,3320.25
  other v7: 3740,1936.91 3740,2010
GND_CAN: C7.2 C8.2 D2.4 D2.5 DC-DC1.3 JP2.5 U3.7 | length 2002.6
  Top Layer w20: D2.5 3917.12,2691.72 3928.84,2680 4213.28,2680 4225.17,2691.89 4225.17,2743.09 U3.7 ; D2.4 v3(3917.12,3026.5)
  Top Layer w35: JP2.5@3484.97,2748.94 3697.57,2748.94 3697.95,2749.32 D2.5@3911.59,2749.32 ; C8.2 C7.2 3789.5,2395.34 3820,2425.84 DC-DC1.3
  Bottom Layer w25: JP2.5@3697.57,2748.94 3759.48,2748.94 ; DC-DC1.3 3820,2688.42 3759.48,2748.94 ; v3(3917.12,3026.5) 3917.12,2906.58 3759.48,2748.94
GPS_MISO: GPS1.4 R14.1 R16.1 R19.1 | length 2451.7
  Top Layer w12: v3(5400,3320.18) 5400,3375
  Top Layer w15: R16.1 5408.79,3578.71 5400,3569.92 v3(5400,3320.18) 5400,3153.79 5408.79,3145 5437.61,3145 R19.1
  Top Layer w20: GPS1.4 4542.28,2367.72 4559.66,2350.34 R14.1
  Bottom Layer w20: GPS1.4 4542.28,2667.28 4585.17,2710.17 5335.17,2710.17 5400,2775 v3(5400,3320.18)
GPS_MOSI: GPS1.5 R15.1 R17.1 R20.1 | length 2001.9
  Top Layer w20: GPS1.5 4592.28,2387.72 4627.11,2352.89 R15.1@4627.11,2226.65 ; v3(5438.83,3268.32) R17.1 ; R20.1 v3(5438.83,3268.32)
  Bottom Layer w20: GPS1.5 4595.99,2544.23 4595.99,2645.99 4630,2680 5365,2680 5438.83,2753.83 v3(5438.83,3268.32)
IOLoRa: LORA1.13 U2.28 | length 642.5
  Top Layer w20: U2.28 5779.09,3054.09 5810,3085 LORA1.13
MISO: LORA1.7 R14.2 U2.23 | length 3007
  Top Layer w20: R14.2 4559.56,2147.8 4559.56,2110.39 v3(4559.7,2110.25) ; v3@5108.94,2750 U2.23 ; v3(5110.27,2746.73) 5113.27,2746.73 5150,2710 5900,2710 5960,2770 LORA1.7
  Bottom Layer w20: v3(4559.7,2110.25) 4372.18,2110.25 4345,2137.43 4345,2680 4411.6,2746.6 5110.14,2746.6 v3(5110.27,2746.73)
MOSI: LORA1.5 R15.2 U2.16 | length 3322.9
  Top Layer w20: v3(4627.11,2072.83) R15.2 ; v3@4758.94,2790 U2.16 ; v3(4760.48,2781.6) 4760.48,2716.31 4796.8,2680 5945,2680 6010,2745 LORA1.5
  Bottom Layer w20: v3(4627.11,2072.83) 4367.17,2072.83 4315,2125 4315,2700 4396.6,2781.6 v3(4760.48,2781.6)
NetC9_1: C9.1 L2.1 U4.6 | length 369.2
  Top Layer w12: C9.1 3967.31,2140.75 3992.12,2115.94 3992.12,2016.11 L2.1@3998.23,2010
  Top Layer w15: U4.6 3837.44,2015.82 3846.23,2007.03 4001.2,2007.03 L2.1
NetC9_2: C9.2 R6.1 | length 53.7
  Top Layer w30: C9.2 4038.27,2148.54 4090.65,2148.54 R6.1 R6.1@4091.49,2147.7
NetC16_2: C16.2 R9.1 U4.2 | length 313.9
  Top Layer w12: U4.2 3811.85,1906.2 3824.64,1893.41 v2(3824.64,1892.67)
  Top Layer w25: R9.1@3683.82,1943.24 3684.04,1943.02 3684.04,1848.15 C16.2@3686.28,1845.9
  Bottom Layer w20: v2(3684.04,1892.67) v2(3824.64,1892.67)
NetD3_2: D3.2 L1.1 | length 301.8
  Top Layer w40: L1.1 3498.43,1646.29 3578.71,1646.29 3683.9,1541.1 3683.9,1478.42 D3.2
NetD5_2: D5.2 R8.2 | length 76.9
  Top Layer w20: D5.2 5043.53,2138.07 5053.38,2147.91 R8.2
NetLED1_1: LED1.1 R2.1 | length 80
  Top Layer w20: R2.1@3516.57,3260.94 LED1.1@3516.57,3340.93
NetR6_2: R6.2 U4.4 | length 473.6
  Top Layer w12: U4.4 3863.03,1958.23 3863.13,1958.14 v3(3917.94,1958.14)
  Top Layer w20: R6.2 4170.1,2149.07 4210.26,2149.07 v3(4210.88,2149.69)
  Bottom Layer w20: v3(3917.94,1958.14) 4019.95,1958.14 4210.88,2149.06 v3(4210.88,2149.69)
NetR7_1: R7.1 U4.3 | length 546.6
  Top Layer w12: U4.3 3837.44,1924.58 3866.87,1895.16 3872.24,1895.16 v2@3874.64,1897.56
  Top Layer w20: v2(3489.64,1846.69) R7.1
  Bottom Layer w20: v2(3489.64,1846.69) 3828.67,1846.69 v2(3874.64,1892.67)
NetR9_2: R9.2 U4.8 | length 138.7
  Top Layer w12: R9.2@3693.57,2031.72 R9.2@3703.92,2031.72
  Top Layer w15: R9.2 3685,2023.87 3685,2046.21 3693.79,2055 U4.8@3784.66,2055
NetR10_1: R10.1 R11.2 R12.1 | length 151.9
  Top Layer w25: R12.1@3751.28,1770.51 R12.1@3751.91,1771.14 ; R12.1 3754.8,1770.94 3904.49,1770.94 R11.2 ; R11.2@3885.42,1770.79 R11.2@3886.05,1770.16
NetR10_2: R10.2 U4.1 | length 139.4
  Top Layer w12: U4.1 3786.26,1883.38 3819.8,1849.84 R10.2 ; R10.2@3818.68,1850.11 R10.2@3819.57,1849.22
NRST: LORA1.9 U2.26 | length 836.7
  Top Layer w20: U2.26 5869.09,2954.09 5910,2995 LORA1.9
RESET: JP1.4 PB1.3 PB1.4 U1.3 | length 2252
  Top Layer w20: PB1.4 v5@3911.38,3568.31 ; v5(3920,3568.31) PB1.3 4032.05,3535 4110.63,3535 4133.35,3557.72 4143.03,3567.4 U1.3
  Bottom Layer w20: v5(3920,3568.31) 3920.4,3568.31 3972.09,3620 5680,3620 5720,3580 JP1.4
RST: R1.2 U1.2 U2.3 | length 922.9
  Top Layer w20: R1.2 4075,3610 4090,3625 4225,3625 4238.31,3611.69 U1.2 4246.97,3563.46 4264.18,3580.68 v5@4312.36,3580.68 ; U2.3@4585.35,3450 U2.3 4590.35,3455 4651.74,3455 4685.41,3488.67 v5(4685.41,3578.46)
  Bottom Layer w20: v5(4308.43,3578.46) v5(4685.41,3578.46)
RTK_RST_1: GPS1.1 R21.1 U2.10 | length 1052.8
  Top Layer w20: R21.1 4357.49,2342.49 4392.28,2377.28 GPS1.1 4392.28,3042.28 4454.09,3104.09 U2.10
RXD0: JP1.1 U2.34 | length 843.9
  Bottom Layer w20: v3(5278.43,3354.09) 5280.25,3354.09 5298.65,3372.49 5972.49,3372.49 6020,3420 JP1.1
RXD1: R19.2 U2.30 | length 86.2
  Top Layer w20: U2.30 5354.34,3154.09 5360.09,3148.35 R19.2
RXD2: GPS1.13 U2.14 | length 1016.5
  Top Layer w20: U2.14 4589.45,2657.2 4626.65,2620 5248.28,2620 5285,2583.28 5285,2542.06 GPS1.13
RXD3: U2.8 U3.3 | length 633
  Top Layer w20: U3.3 4175.87,3155.87 4224.09,3204.09 U2.8
SCL: R3.2 R16.2 U2.37 | length 152.6
  Top Layer w20: U2.37 R3.2@5364.09,3504.09 ; R3.2 R16.2
SCLK: GPS1.2 LORA1.3 R13.2 U2.11 | length 3524.5
  Top Layer w20: R13.2 4425.01,2340.01 4442.28,2357.28 GPS1.2 4442.28,3012.28 4484.09,3054.09 U2.11
  Bottom Layer w20: GPS1.2 4442.11,2540.35 4442.11,2378.65 4457.72,2363.04 5993.04,2363.04 6060,2430 LORA1.3
SDA: R4.2 R17.2 U2.36 | length 153.1
  Top Layer w20: U2.36 R4.2@5364.88,3454.09 ; R17.2 R4.2
TXD0: JP1.2 U2.35 | length 714.4
  Bottom Layer w20: v3(5278.43,3404.09) 5889.09,3404.09 5920,3435 JP1.2
TXD1: R20.2 U2.31 | length 87.7
  Top Layer w20: U2.31 5354.34,3204.09 5360.09,3209.84 R20.2
TXD2: GPS1.14 U2.13 | length 1106
  Top Layer w20: U2.13 4633.28,2954.09 4645,2942.38 4645,2685 4680,2650 5290,2650 5335,2605 5335,2542.06 GPS1.14
TXD3: U2.9 U3.2 | length 538.9
  Top Layer w20: U3.2 4226.56,2957.07 4226.56,3116.56 4264.09,3154.09 U2.9
VIN: D3.1 D4.2 JP2.1 JP3.1 | length 3112.1
  Top Layer w40: D4.2 3851.08,1286.59 3851.08,1473.41 D3.1 3946.2,1475 JP3.1
  Bottom Layer w40: JP2.1@3484.97,3148.94 3576.57,3148.94 3600,3125.51 ; JP2.1@3697.57,3148.94 3623.43,3148.94 3600,3125.51 ; JP3.1 4098.62,1413.62 4265,1580 4265,2410 4240,2435 3623.43,2435 3600,2458.43 3600,3125.51
VIN_0: C10.2 C11.2 C12.2 L1.2 R7.2 U4.7 | length 865.8
  Top Layer w12: C10.2@3618.69,2088.36 3635.33,2105 3804.82,2105 3811.85,2097.97 U4.7
  Top Layer w30: C10.2 3618.81,2080.61 3618.81,1994.46 C12.2@3618.81,1925.86 ; C12.2 3618.81,1915.67 C12.2@3618.81,1925.86 ; L1.2 3700,1650 3622.87,1727.13 R7.2 3622.87,1921.8 C12.2@3618.81,1925.86
  Top Layer w40: C10.2 C10.2@3618.69,2088.36
pads on no net: BATT1. C1.0 C2.0 C3.0 C4.0 C5.0 C6.0 C7.0 C8.0 C9.0 C10.0 C11.0 C12.0 C13.0 C14.0 C15.0 C16.0 C17.0 C18.0 C19.0 C20.0 C21.0 C22.0 C23.0 C24.0 D2.0 D2.2 D2.7 D3.0 D4.0 D5.0 GPS1.6 GPS1.S/2 LED1.0 LORA1.2 LORA1.4 LORA1.S/2 R1.0 R2.0 R3.0 R4.0 R5.0 R6.0 R7.0 R8.0 R9.0 R10.0 R11.0 R12.0 R13.0 R14.0 R15.0 R16.0 R17.0 R18.0 R19.0 R20.0 R21.0 U2.4 U2.5 U2.6 U2.7 U2.17 U2.18 U2.19 U2.20 U2.21 U2.22 U2.32 U2.33 U3.0 U5.0 U6.0

## Polygon pours and split planes (outlines as drawn)
GND on Bottom Layer "GNDt_Bot" (solid, remove dead copper, pour order 5): 6531.03,3675 6531.03,1185 3365,1185 3365,3675
3V3_GPS on Bottom Layer "3V3_GPS" (solid, remove dead copper, pour order 1): 5360,1715 6450,1715 6450,2345 5365.16,2345
3V3 on Bottom Layer "3V3" (solid, remove dead copper, pour order 0): 4544.66,2050 5350,2050 5350,1235 4550.28,1235
GND on Top Layer "GNDt_Top" (solid, remove dead copper, pour order 4): 6531.03,3675 6531.03,1185 3365,1185 3365,3675
3V3_GPS on Top Layer "3V3_GPS" (solid, remove dead copper, pour order 3): 5360,1715 6450,1715 6450,2345 5365.16,2345
3V3 on Top Layer "3V3" (solid, remove dead copper, pour order 2): 4544.66,2050 5350,2050 5350,1235 4550.28,1235

## Keep-outs
Top Layer:
  circle w10: c6399.65,2012.56 r64.17
Keep-Out Layer:
  lines w7.87: 3365,1185 6531.03,1185 6531.03,3675 3365,3675 3365,1185

## Other copper
Top Layer:
  pour cut-out: 3399.64,1597.56 3399.64,1672.56 3374.64,1672.56 3374.64,1597.56
  pour cut-out: 4190,1652.5 4115,1652.5 4115,1627.5 4190,1627.5
  pour cut-out: 4090,1652.5 4015,1652.5 4015,1627.5 4090,1627.5
  pour cut-out: 3990,1652.5 3915,1652.5 3915,1627.5 3990,1627.5
  pour cut-out: 4174.71,2322.51 4261.54,2322.51 4261.54,2347.51 4174.71,2347.51
  pour cut-out: 4262.5,1700 4262.5,1775 4237.5,1775 4237.5,1700
  pour cut-out: 4262.5,1800 4262.5,1875 4237.5,1875 4237.5,1800
  pour cut-out: 4262.5,1925 4262.5,2000 4237.5,2000 4237.5,1925
  pour cut-out: 4262.5,2025 4262.5,2100 4237.5,2100 4237.5,2025
  pour cut-out: 4262.5,2125 4262.5,2200 4237.5,2200 4237.5,2125
  pour cut-out: 4262.5,2225 4262.5,2300 4237.5,2300 4237.5,2225
  pour cut-out: 3782.48,2038.69
  pour cut-out: 3782.48,2038.69
  pour cut-out: 3399.64,2222.56 3399.64,2297.56 3374.64,2297.56 3374.64,2222.56
  pour cut-out: 3399.64,2122.56 3399.64,2197.56 3374.64,2197.56 3374.64,2122.56
  pour cut-out: 3399.64,2022.56 3399.64,2097.56 3374.64,2097.56 3374.64,2022.56
  pour cut-out: 3399.64,1922.56 3399.64,1997.56 3374.64,1997.56 3374.64,1922.56
  pour cut-out: 3399.64,1797.56 3399.64,1872.56 3374.64,1872.56 3374.64,1797.56
  pour cut-out: 3399.64,1697.56 3399.64,1772.56 3374.64,1772.56 3374.64,1697.56
  pour cut-out: 4074.71,2322.51 4149.71,2322.51 4149.71,2347.51 4074.71,2347.51
  pour cut-out: 3974.71,2322.51 4049.71,2322.51 4049.71,2347.51 3974.71,2347.51
  pour cut-out: 3874.71,2322.51 3949.71,2322.51 3949.71,2347.51 3874.71,2347.51
  pour cut-out: 3774.71,2322.51 3849.71,2322.51 3849.71,2347.51 3774.71,2347.51
  pour cut-out: 3674.71,2322.51 3749.71,2322.51 3749.71,2347.51 3674.71,2347.51
  pour cut-out: 3574.71,2322.51 3649.71,2322.51 3649.71,2347.51 3574.71,2347.51
  pour cut-out: 3474.71,2322.51 3549.71,2322.51 3549.71,2347.51 3474.71,2347.51
  pour cut-out: 3374.71,2322.51 3374.71,2347.51 3449.71,2347.51 3449.71,2322.51
  pour cut-out: 3449.64,2347.56 3374.64,2347.56 3374.64,2322.56 3449.64,2322.56
  pour cut-out: 3549.64,2347.56 3474.64,2347.56 3474.64,2322.56 3549.64,2322.56
  pour cut-out: 3649.64,2347.56 3574.64,2347.56 3574.64,2322.56 3649.64,2322.56
  pour cut-out: 3749.64,2347.56 3674.64,2347.56 3674.64,2322.56 3749.64,2322.56
  pour cut-out: 3849.64,2347.56 3774.64,2347.56 3774.64,2322.56 3849.64,2322.56
  pour cut-out: 3949.64,2347.56 3874.64,2347.56 3874.64,2322.56 3949.64,2322.56
  pour cut-out: 4049.64,2347.56 3974.64,2347.56 3974.64,2322.56 4049.64,2322.56
  pour cut-out: 4149.65,2347.56 4074.64,2347.56 4074.64,2322.56 4149.65,2322.56
  pour cut-out: 3779.64,2107.56 3857.25,2107.56 3857.25,2026.48 3779.64,2026.48
  pour cut-out: 3844.64,1987.56
  pour cut-out: 3975.53,1991.7 3844.64,1991.7 3844.64,1872.56 3975.53,1872.56
Bottom Layer:
  pour cut-out: 3399.64,1597.56 3399.64,1672.56 3374.64,1672.56 3374.64,1597.56
  pour cut-out: 4262.5,2225 4262.5,2300 4237.5,2300 4237.5,2225
  pour cut-out: 4262.5,1925 4262.5,2000 4237.5,2000 4237.5,1925
  pour cut-out: 4262.5,2125 4262.5,2200 4237.5,2200 4237.5,2125
  pour cut-out: 4262.5,2025 4262.5,2100 4237.5,2100 4237.5,2025
  pour cut-out: 4262.5,1800 4262.5,1875 4237.5,1875 4237.5,1800
  pour cut-out: 4262.5,1700 4262.5,1775 4237.5,1775 4237.5,1700
  pour cut-out: 3399.64,1697.56 3399.64,1772.56 3374.64,1772.56 3374.64,1697.56
  pour cut-out: 3399.64,1797.56 3399.64,1872.56 3374.64,1872.56 3374.64,1797.56
  pour cut-out: 3399.64,2022.56 3399.64,2097.56 3374.64,2097.56 3374.64,2022.56
  pour cut-out: 3399.64,2122.56 3399.64,2197.56 3374.64,2197.56 3374.64,2122.56
  pour cut-out: 3399.64,1922.56 3399.64,1997.56 3374.64,1997.56 3374.64,1922.56
  pour cut-out: 3399.64,2222.56 3399.64,2297.56 3374.64,2297.56 3374.64,2222.56
  pour cut-out: 3374.71,2322.51 3374.71,2347.51 3449.71,2347.51 3449.71,2322.51
  pour cut-out: 3474.71,2322.51 3549.71,2322.51 3549.71,2347.51 3474.71,2347.51
  pour cut-out: 3574.71,2322.51 3649.71,2322.51 3649.71,2347.51 3574.71,2347.51
  pour cut-out: 3674.71,2322.51 3749.71,2322.51 3749.71,2347.51 3674.71,2347.51
  pour cut-out: 3774.71,2322.51 3849.71,2322.51 3849.71,2347.51 3774.71,2347.51
  pour cut-out: 3874.71,2322.51 3949.71,2322.51 3949.71,2347.51 3874.71,2347.51
  pour cut-out: 3974.71,2322.51 4049.71,2322.51 4049.71,2347.51 3974.71,2347.51
  pour cut-out: 4074.71,2322.51 4149.71,2322.51 4149.71,2347.51 4074.71,2347.51
  pour cut-out: 3549.64,2347.56 3474.64,2347.56 3474.64,2322.56 3549.64,2322.56
  pour cut-out: 3649.64,2347.56 3574.64,2347.56 3574.64,2322.56 3649.64,2322.56
  pour cut-out: 3749.64,2347.56 3674.64,2347.56 3674.64,2322.56 3749.64,2322.56
  pour cut-out: 3849.64,2347.56 3774.64,2347.56 3774.64,2322.56 3849.64,2322.56
  pour cut-out: 3949.64,2347.56 3874.64,2347.56 3874.64,2322.56 3949.64,2322.56
  pour cut-out: 4049.64,2347.56 3974.64,2347.56 3974.64,2322.56 4049.64,2322.56
  pour cut-out: 4149.65,2347.56 4074.64,2347.56 4074.64,2322.56 4149.65,2322.56
  pour cut-out: 4261.52,2347.56 4261.52,2322.56 4174.65,2322.56 4174.65,2347.56
  pour cut-out: 3449.64,2347.56 3374.64,2347.56 3374.64,2322.56 3449.64,2322.56

## Silkscreen, mask and mechanical layers (free items; w line width, h text height)
Top Overlay:
  lines w7.87: 5774.53,3147.45 5774.53,3268.88 6145.18,3268.88 6145.36,3268.7 6145.36,3147.82 5774.9,3147.82 5774.53,3147.45
  text "GND" at 5636,3560 h20 r90
  text "RESET" at 5736,3560 h20 r90
  text "BOOT" at 5836,3560 h20 r90
  text "TX" at 5936,3560 h20 r90
  text "RX" at 6036,3560 h20 r90
  text "@Des 2023 / Grader GPS / Toho Guidance System" at 6274.69,3365 h20 r270
  text "GND" at 5794,3350 h20 r270
  text "GND" at 5894,3350 h20 r270
  text "GND" at 5944,3350 h20 r270
  text "5V" at 5842.96,3329.38 h20 r270
  text "5V" at 5993.89,3329.08 h20 r270
  text "RX" at 6093.62,3329.08 h20 r270
  text "DIO_1" at 5789.13,3132.99 h20 r270
  text "BUSY" at 5842.32,3133.38 h20 r270
  text "NRST" at 5894.04,3133.38 h20 r270
  text "MISO" at 5943.71,3133.38 h20 r270
  text "MOSI" at 5994.19,3133.11 h20 r270
  text "SCLK" at 6044.07,3132.75 h20 r270
  text "CS" at 6093.85,3132.8 h20 r270
Bottom Overlay:
  text "GND" at 5826,3350.08 h20 r90
  text "Reset" at 4413.77,2483.92 h30 r90
  text "SCL/SCK" at 4463.78,2483.89 h30 r90
  text "SDA/CS" at 4512.11,2484.18 h30 r90
  text "TX1/MISO" at 4563.14,2484.01 h30 r90
  text "RX1/MOSI" at 4613.67,2484.21 h30 r90
  text "PPS" at 4663.59,2484.18 h30 r90
  text "GND" at 4713.53,2483.98 h30 r90
  text "3V3" at 5054.54,2484.12 h30 r90
  text "3V3" at 5104.46,2484.03 h30 r90
  text "D_SEL" at 5156.86,2484.24 h30 r90
  text "Backup" at 5209.46,2483.84 h30 r90
  text "GND" at 5259.43,2484.16 h30 r90
  text "TX2" at 5304.26,2483.85 h30 r90
  text "RX2" at 5354.57,2484.08 h30 r90
Mechanical 1:
  lines w7.87: 6365,1454.86 6365.39,1455.26

## Text inside footprints (layer, text, board x,y; h text height)
GPS1: Top Overlay "SCL/SCK" at 4463.28,2272.09 h30 r90; Top Overlay "SDA/CS" at 4513.28,2302.08 h30 r90; Top Overlay "PPS" at 4663.28,2330.74 h30 r90; Top Overlay "RX1/MOSI" at 4613.28,2257.09 h30 r90; Top Overlay "D_SEL" at 5156.96,2332.07 h30 r90; Top Overlay "GND" at 5254.46,2392.05 h30 r90; Top Overlay "TX2" at 5304.46,2360.73 h30 r90; Top Overlay "Reset" at 4413.28,2342.07 h30 r90; Top Overlay "TX1/MIS0" at 4563.28,2247.1 h30 r90; Top Overlay "GND" at 4713.28,2392.05 h30 r90; Top Overlay "3V3" at 5054.46,2392.05 h30 r90; Top Overlay "3V3" at 5104.46,2392.05 h30 r90; Top Overlay "Backup" at 5209.46,2302.08 h30 r90; Top Overlay "RX2" at 5354.46,2392.05 h30 r90
LORA1: Bottom Overlay "SCLK" at 6070,3126.91 h20 r90; Bottom Overlay "CS" at 6120,3126.91 h20 r90; Bottom Overlay "RX" at 6120,3323.2 h20 r90; Bottom Overlay "GND" at 5970,3343.19 h20 r90; Bottom Overlay "5V" at 6020,3323.2 h20 r90; Bottom Overlay "GND" at 5920,3343.19 h20 r90; Bottom Overlay "DIO_1" at 5818.33,3126.91 h20 r90; Bottom Overlay "MOSI" at 6020,3126.91 h20 r90; Bottom Overlay "NRST" at 5920,3126.91 h20 r90; Bottom Overlay "5V" at 5870,3323.2 h20 r90; Bottom Overlay "BUSY" at 5870,3126.91 h20 r90; Bottom Overlay "MISO" at 5970,3126.91 h20 r90